# Altium PCB BMS_MAINBOARD_3.PcbDoc (part 1 of 3)
Units mm, origin at the board's own origin, x right, y up, seen from the top; angles counter-clockwise.
Board outline 295.3 x 101.15 mm, 2 copper layers (Top Layer, Bottom Layer), stack 1.571 mm thick; 250 components, 184 nets, 817 pads, 458 vias.
Unrouted connection lines stored in the file: 84.
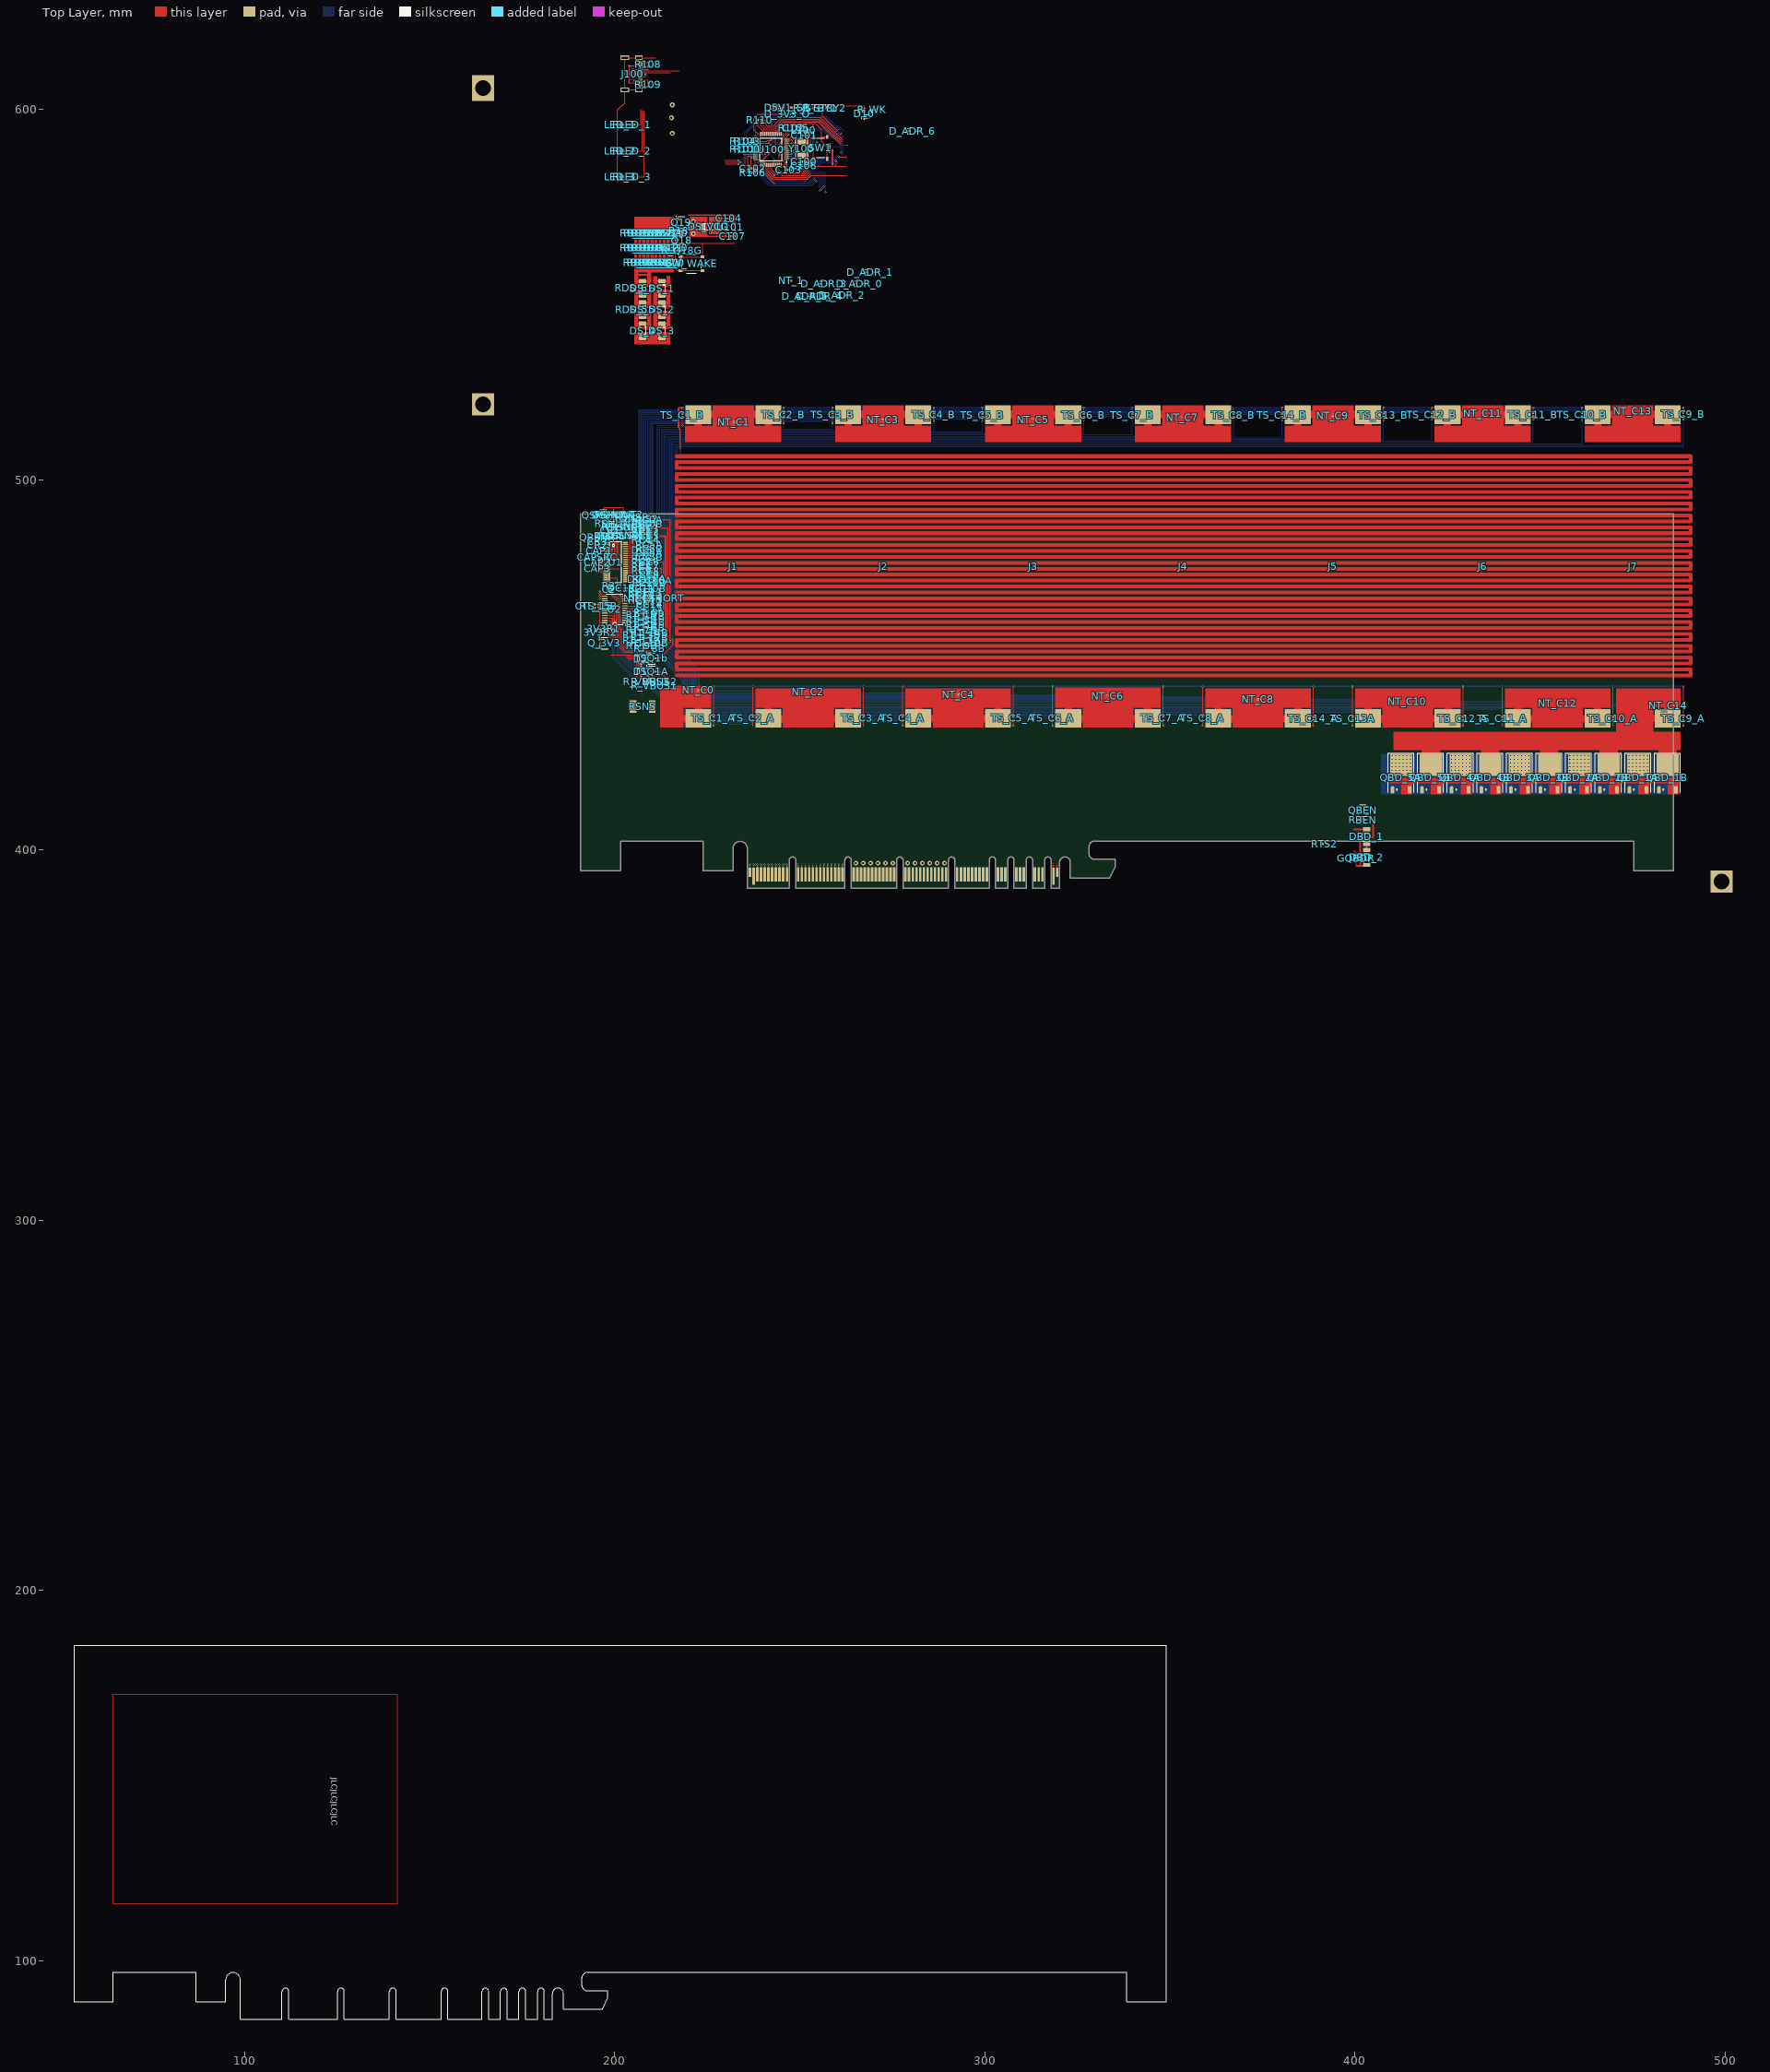
[diagram p0: Top Layer view]
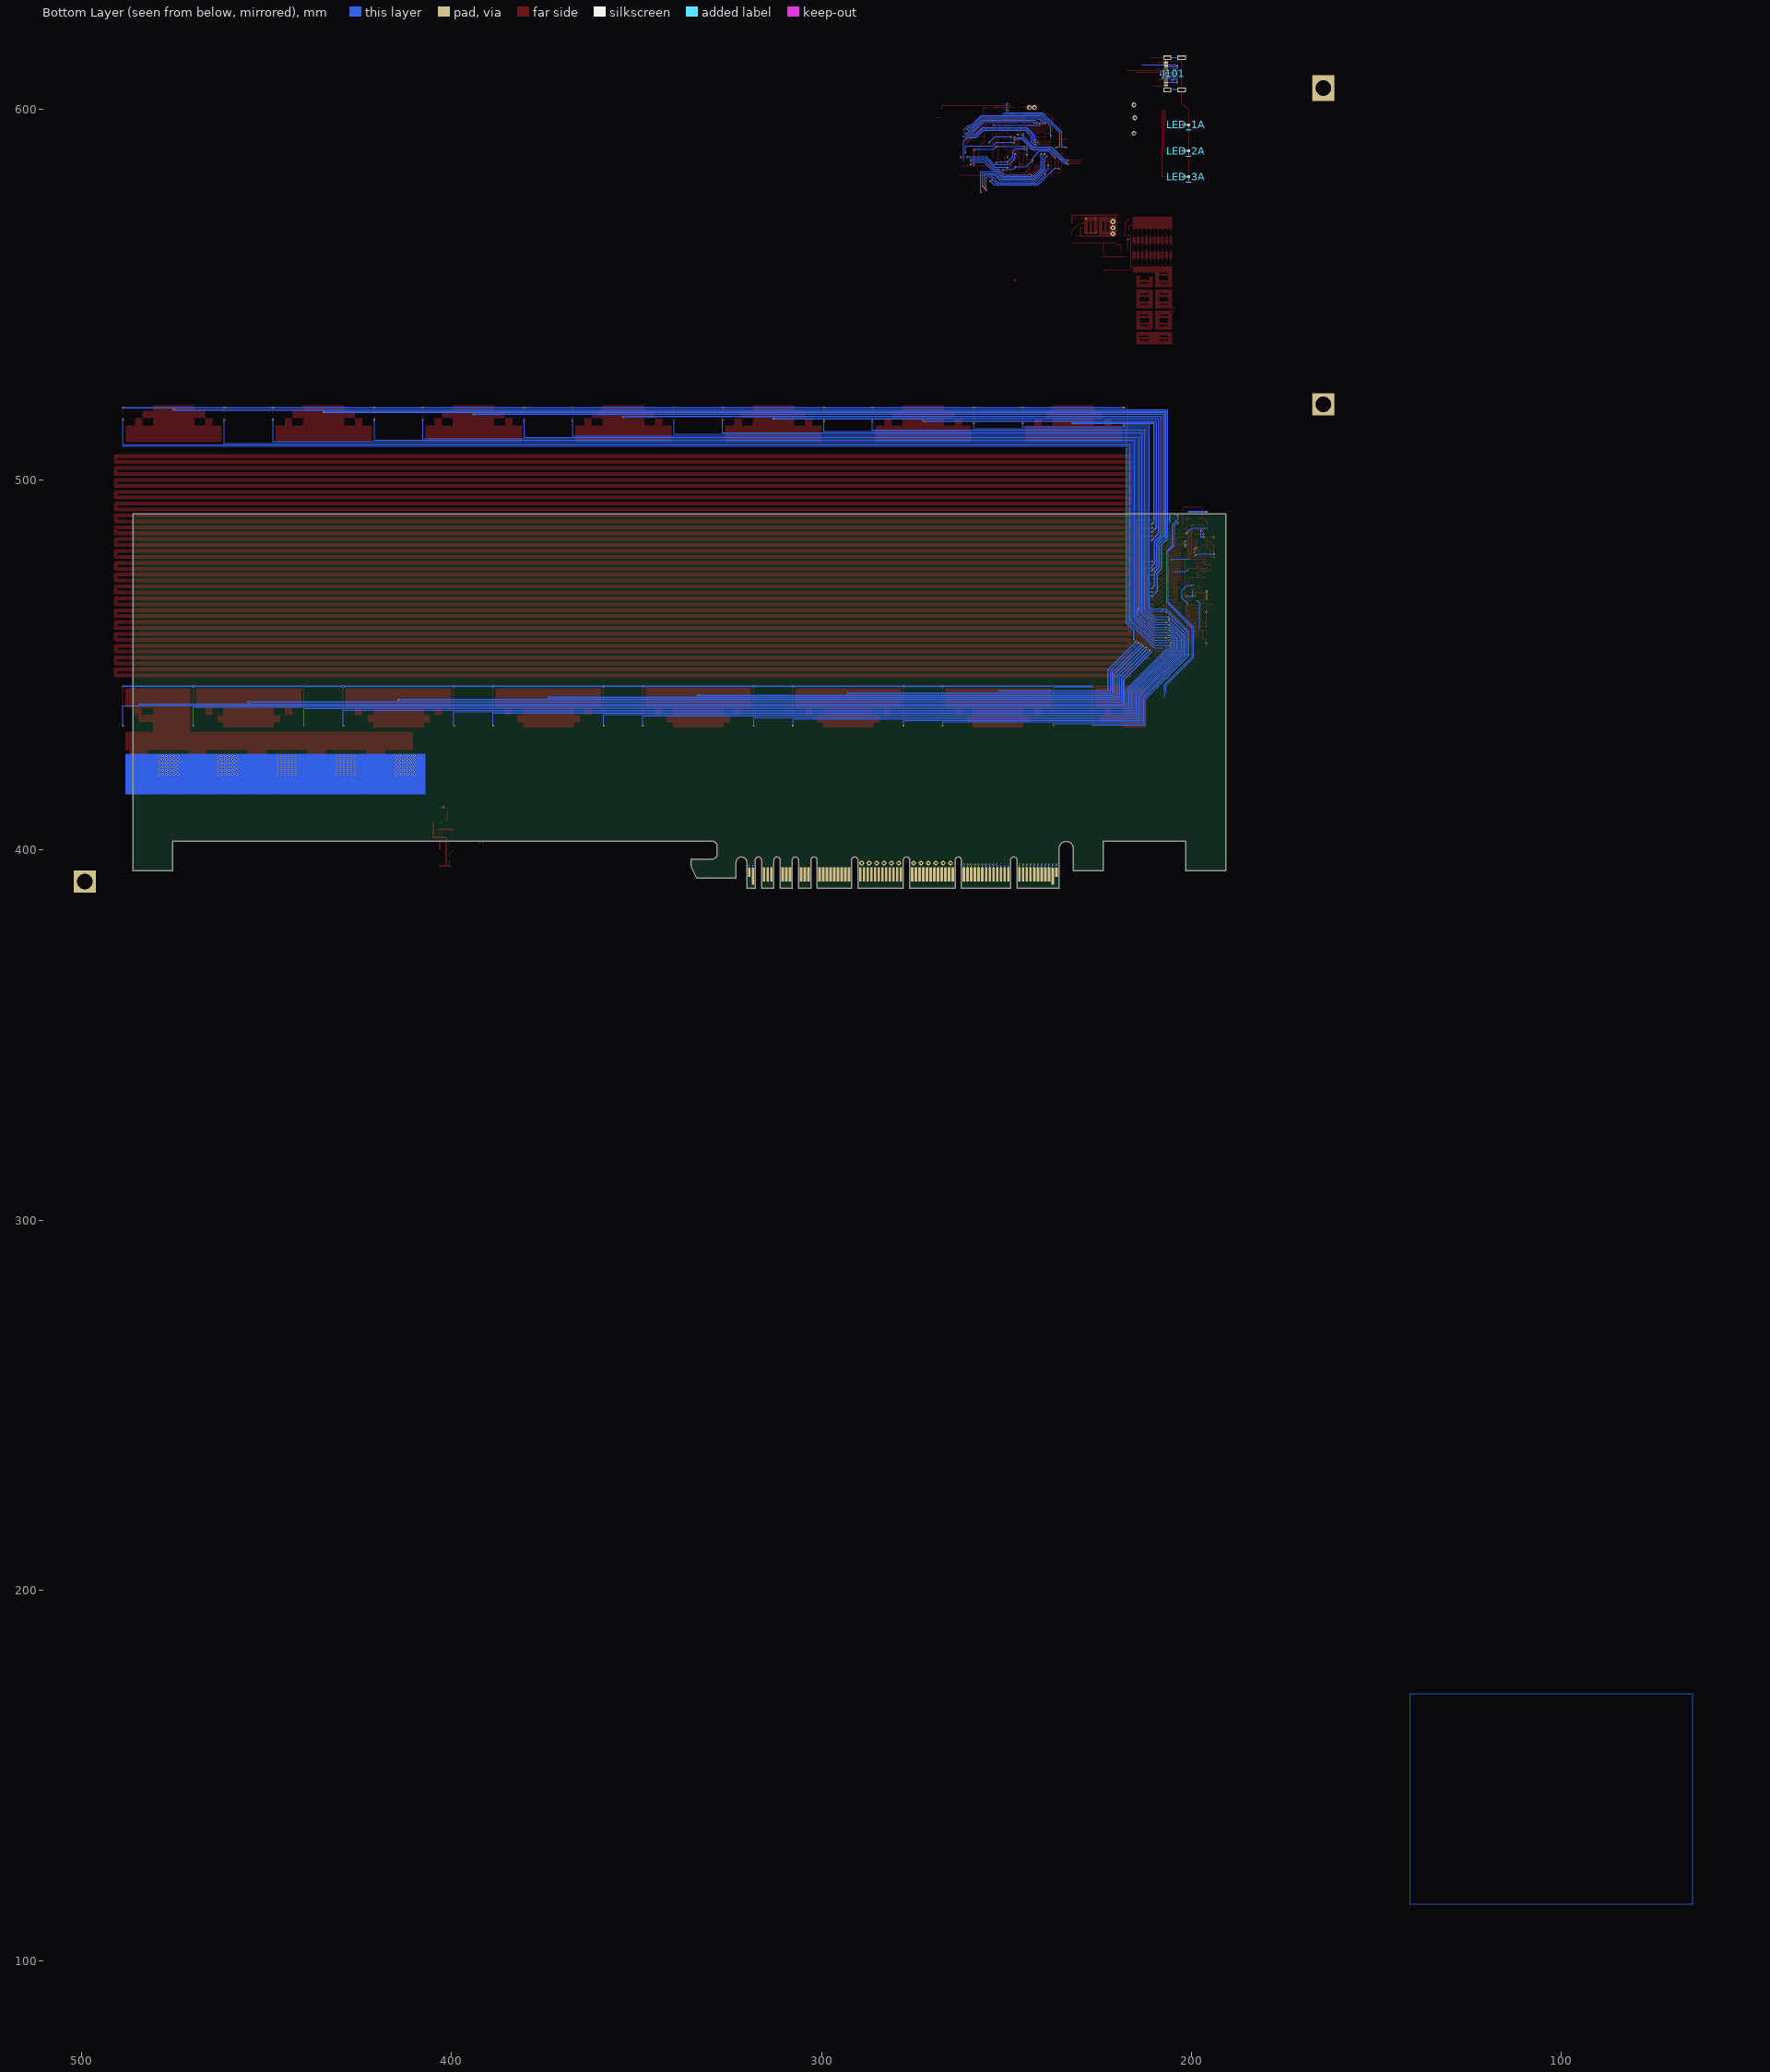
[diagram p1: Bottom Layer view, seen from below]

## Layer stack, top to bottom
Top Solder: solder mask 0.0102, Solder Resist, Dk 3.5
Top Layer: signal copper 0.0356
Dielectric 1: core 1.5, FR-4, Dk 4.2
Bottom Layer: signal copper 0.0356
Bottom Solder: solder mask 0.0102, Solder Resist, Dk 3.5

## Board outline
247.05,389.7 ccw(c247.05,389.75) 247.1,389.75 ccw(c247.05,389.75) 247.1,389.751 247.1,397.25 cw(c248,397.25) 248.9,397.251 ccw(c248.95,397.25) 248.9,397.25 248.9,389.75 ccw(c248.95,389.75) 248.975,389.706 ccw(c249,389.75) 249,389.7 262.099,389.7 ccw(c262.1,389.75) 262.15,389.75 262.15,397.3 ccw(c262.1,397.3) 262.15,397.3 cw(c263,397.3) 263.85,397.3 263.85,389.75 ccw(c263.9,389.75) 263.9,389.7 276.1,389.7 ccw(c276.1,389.75) 276.15,389.75 276.15,397.3 ccw(c276.1,397.3) 276.15,397.3 cw(c277,397.3) 277.85,397.3 277.85,389.75 ccw(c277.9,389.75) 277.9,389.7 290.1,389.7 ccw(c290.1,389.75) 290.15,389.75 290.15,397.3 ccw(c290.1,397.3) 290.15,397.3 ccw(c291,397.3) 290.15,397.3 cw(c291,397.3) 291.85,397.3 291.85,389.75 ccw(c291.9,389.75) 291.9,389.7 301.1,389.7 ccw(c301.1,389.75) 301.15,389.75 301.15,397.3 cw(c301.1,397.3) 301.15,397.3 ccw(c301.1,397.3) 301.15,397.3 cw(c302,397.3) 302.85,397.3 302.85,389.75 ccw(c302.9,389.75) 302.9,389.7 306.1,389.7 ccw(c306.1,389.75) 306.15,389.75 306.15,397.3 cw(c307,397.3) 307.85,397.3 307.85,389.75 ccw(c307.9,389.75) 307.9,389.7 311.1,389.7 ccw(c311.1,389.75) 311.15,389.75 311.15,397.3 cw(c312,397.3) 312.85,397.3 312.85,389.75 ccw(c312.9,389.75) 312.9,389.7 316.1,389.7 ccw(c316.1,389.75) 316.15,389.75 316.15,397.3 ccw(c316.1,397.3) 316.15,397.3 cw(c317,397.3) 317.85,397.3 317.85,389.75 ccw(c317.9,389.75) 317.9,389.7 320.1,389.7 ccw(c320.1,389.75) 320.15,389.75 320.15,396.7 cw(c321.6,396.7) 323.05,396.7 323.05,392.5 ccw(c323.1,392.5) 323.1,392.45 333.7,392.45 ccw(c333.7,392.5) 333.746,392.479 335.146,395.479 ccw(c335.1,395.5) 335.146,395.479 ccw(c335.1,395.5) 335.15,395.5 335.15,397.5 ccw(c335.1,397.5) 335.1,397.55 329.55,397.55 ccw(c329.55,397.5) 329.549,397.55 ccw(c329.55,398.95) 329.55,397.55 329.549,397.55 cw(c329.55,398.95) 328.15,398.95 328.15,400.98 cw(c329.62,400.973) 329.62,402.443 ccw(c329.62,402.493) 329.646,402.45 475.243,402.45 475.243,394.5 ccw(c475.293,394.5) 475.297,394.45 ccw(c475.3,394.5) 475.3,394.45 486,394.45 ccw(c486,394.5) 486.05,394.5 486.05,394.501 486.05,490.8 ccw(c486,490.8) 486,490.85 190.8,490.85 ccw(c190.8,490.8) 190.75,490.8 190.75,394.5 ccw(c190.8,394.5) 190.8,394.45 201.5,394.45 ccw(c201.5,394.5) 201.55,394.5 ccw(c201.5,394.5) 201.544,394.525 201.544,402.45 223.793,402.45 223.793,394.5 ccw(c223.843,394.5) 223.847,394.45 ccw(c223.85,394.5) 223.85,394.45 231.85,394.45 ccw(c231.85,394.5) 231.9,394.5 231.9,400.4 ccw(c231.85,400.4) 231.894,400.425 cw(c233.843,400.4) 235.793,400.4 ccw(c235.843,400.4) 235.8,400.375 235.8,389.75 ccw(c235.85,389.75) 235.85,389.7

## Design rules (kind name [scope] priority, off if disabled: settings)
Clearance [All] p1: gap=0.2 ignorepadtopadclearanceinfootprint=FALSE except(0: Arc-Hole Track-Hole SMDPad-Hole THPad-Hole Via-Hole Fill-Hole Poly-Hole Region-Hole Text-Hole)
PolygonConnect [All] p1: thpad.connectstyle=Relief thpad.reliefconductorwidth=0.254 thpad.reliefentries=4 thpad.polygonreliefangle="90 Angle" thpad.airgapwidth=0.254 smdpad.connectstyle=Relief smdpad.reliefconductorwidth=0.254 smdpad.reliefentries=4 smdpad.polygonreliefangle="90 Angle" smdpad.airgapwidth=0.254 via.connectstyle=Direct via.reliefconductorwidth=0.254 via.reliefentries=4 via.polygonreliefangle="90 Angle" via.airgapwidth=0.254
RoutingVias [All] p1: holewidth=0.711 width=1.27 viastyle="Through Hole" minholewidth=0.711 minwidth=1.27 maxholewidth=0.711 maxwidth=1.27
SolderMaskExpansion [All] p1: expansion=0.102
Width [All] p1: maxlimit=1 minlimit=0.2 preferedwidth=0.2 minimp=50.000000 maximp=50.000000 favimp=50.000000
30 further rules are at their usual default settings.

## Components (designator, comment, footprint, x,y, rotation, side; value= is the part's Value field where it differs from the comment)
3V3R1 "0402WGF1002TCE" R_0402 197,459.8 r270 top value=10k
3V3R2 "0402WGF1000TCE" R_0402 196.1,458.8 r270 top value=100R
C2 "CL05B104KO5NNNC" C_0402 198.4,470.412 r180 top value=100nF
C100 "0402CG120J500NT" C_0402 251.112,586 r180 top value=12pF
C101 "0402CG120J500NT" C_0402 251.212,593.1 r180 top value=12pF
C102 "CL05A106MQ5NUNC" C_0402 237.319,584.1 r0 top value=10uF
C103 "CL05A106MQ5NUNC" C_0402 247.019,583.7 r180 top value=10uF
C104 "CL05A106MQ5NUNC" C_0402 230.769,570.6 r0 top value=10uF
C105 "CL05A105KA5NQNC" C_0402 249.012,595.1 r270 top value=1uF
C106 "0402CG101J500NT" C_0402 251.112,584.8 r180 top
C107 "CL05A106MQ5NUNC" C_0402 231.769,565.85 r180 top value=10uF
CAP1 "CL05A105KA5NQNC" C_0402 195.8,480.812 r90 top value=1uF
CAP2 "CL05A105KA5NQNC" C_0402 195.3,477.712 r0 top value=1uF
CAP3 "CL05A105KA5NQNC" C_0402 195.3,476.012 r0 top value=1uF
CAPSRC "CL05A105KA5NQNC" C_0402 195.3,479.112 r180 top value=1uF
CC0A "CL05A105KA5NQNC" C_0402 209.4,489.219 r180 top value=1uF
CC0B "CL05A105KA5NQNC" C_0402 209.392,488.112 r0 top value=1uF
CC1 "CL05A105KA5NQNC" C_0402 209.4,487.012 r0 top value=1uF
CC2 "CL05A105KA5NQNC" C_0402 209.4,485.912 r0 top value=1uF
CC3 "CL05A105KA5NQNC" C_0402 209.4,484.812 r0 top value=1uF
CC4 "CL05A105KA5NQNC" C_0402 209.4,483.712 r0 top value=1uF
CC5A "CL05A105KA5NQNC" C_0402 209.4,480.212 r180 top value=1uF
CC5B "CL05A105KA5NQNC" C_0402 209.4,479.112 r180 top value=1uF
CC6 "CL05A105KA5NQNC" C_0402 209.4,477.912 r180 top value=1uF
CC7 "CL05A105KA5NQNC" C_0402 209.4,476.812 r180 top value=1uF
CC8 "CL05A105KA5NQNC" C_0402 209.4,475.412 r0 top value=1uF
CC9 "CL05A105KA5NQNC" C_0402 209.4,474.312 r0 top value=1uF
CC10A "CL05A105KA5NQNC" C_0402 211,472.719 r270 top value=1uF
CC10B "CL05A105KA5NQNC" C_0402 209.4,470.712 r0 top value=1uF
CC11 "CL05A105KA5NQNC" C_0402 209.4,469.712 r0 top value=1uF
CC12 "CL05A105KA5NQNC" C_0402 209.4,468.612 r0 top value=1uF
CC13 "CL05A105KA5NQNC" C_0402 209.4,467.512 r0 top value=1uF
CC14 "CL05A105KA5NQNC" C_0402 209.408,466.412 r0 top value=1uF
CC15 "0402WGF1001TCE" R_0402 209.4,465.412 r0 top value=1k
CR1 "CL05A105KA5NQNC" C_0402 198.8,486.312 r180 top value=1uF
CR2 "CL05A105KA5NQNC" C_0402 195.308,482.312 r0 top value=1uF
CR3 "CL05A105KA5NQNC" C_0402 195.3,483.412 r0 top value=1uF
CSNS0 "CL05B104KO5NNNC" C_0402 202.3,485.012 r270 top value=100nF
CSNS1 "CL05B104KO5NNNC" C_0402 203.7,485.012 r90 top value=100nF
CSNS2 "CL05B104KO5NNNC" C_0402 207.319,489.5 r0 top value=100nF
CTS_15 "CL05B104KO5NNNC" C_0402 194.5,465.919 r90 top value=100nF
D1 "N4148WS" SOD-323 207.1,448.2 r270 top
D2 "N4148WS" SOD-323 207.1,451.6 r90 top
D5V1_SB "N4148WS" SOD-323 246.619,600.6 r0 top
D10 "N4148WS" SOD-323 267.419,598.9 r90 top
D_3V3_O "N4148WS" SOD-323 246.619,598.8 r180 top
D_ADR_0 "N4148WS" SOD-323 266.1,553 r0 top
D_ADR_1 "N4148WS" SOD-323 268.9,556.1 r0 top
D_ADR_2 "N4148WS" SOD-323 261.3,549.9 r0 top
D_ADR_3 "N4148WS" SOD-323 256.5,553 r0 top
D_ADR_4 "N4148WS" SOD-323 255.4,549.6 r0 top
D_ADR_5 "N4148WS" SOD-323 251.4,549.6 r0 top
D_ADR_6 "N4148WS" SOD-323 280.419,594.2 r0 top
DBD_1 "ZMM5V1" DO-213AA 403.081,403.6 r270 top
DBD_2 "ZMM5V1" DO-213AA 403.081,398 r270 top
DC5 "N4148WS" SOD-323 207.4,481.012 r90 top
DC10 "N4148WS" SOD-323 207.2,473.112 r90 top
DC15 "N4148WS" SOD-323 201.8,470.8 r0 top
DS_1 "ZMM5V1" DO-213AA 212.7,551.7 r270 top
DS_2 "ZMM5V1" DO-213AA 212.7,546 r270 top
DS_3 "ZMM5V1" DO-213AA 212.7,540.3 r270 top
DS_4 "ZMM5V1" DO-213AA 207.481,540.307 r90 top
DS_5 "ZMM5V1" DO-213AA 207.5,546 r90 top
DS_6 "ZMM5V1" DO-213AA 207.5,551.7 r90 top
DS_VCC "ZMM5V1" DO-213AA 225.212,568.4 r0 top
DSHUNT "N4148WS" SOD-323 199.7,490.419 r90 top
GQBDR "0402WGF1002TCE" R_0402 400.381,397.8 r270 top value=10k
J1 "KS18650X2-SMT" KS18650X2-SMT 232,476.6 r0 top
J2 "KS18650X2-SMT" KS18650X2-SMT 272.5,476.6 r0 top
J3 "KS18650X2-SMT" KS18650X2-SMT 313,476.6 r0 top
J4 "KS18650X2-SMT" KS18650X2-SMT 353.5,476.6 r0 top
J5 "KS18650X2-SMT" KS18650X2-SMT 394,476.6 r0 top
J6 "KS18650X2-SMT" KS18650X2-SMT 434.5,476.6 r0 top
J7 "KS18650X2-SMT" KS18650X2-SMT 475,476.6 r0 top
J100 "918-418K2023S40001" DX07S016JA1R1500 203.619,609.7 r270 top
J101 "918-418K2023S40001" DX07S016JA1R1500 203.619,609.7 r90 bottom
L100 "SDFL1608S100KTF" L_0603 251.012,594.5 r0 top value=10uH
LED_1 "19-21UYC/S530-A4/TR8" D_0603 201.419,595.9 r0 top
LED_1A "19-21UYC/S530-A4/TR8" D_0603 201.419,595.9 r0 bottom
LED_2 "19-21UYC/S530-A4/TR8" D_0603 201.419,588.9 r0 top
LED_2A "19-21UYC/S530-A4/TR8" D_0603 201.419,588.9 r0 bottom
LED_3 "19-21UYC/S530-A4/TR8" D_0603 201.402,581.9 r0 top
LED_3A "19-21UYC/S530-A4/TR8" D_0603 201.419,581.9 r0 bottom
NT_1 "0" NET_TIE 247.6,553.9 r90 top
NT_2 "0" NET_TIE 199.8,487.819 r270 top
NT_C0 "0" NET_TIE 222.6,443.3 r270 top
NT_C1 "0" NET_TIE 232.2,515.6 r270 top
NT_C2 "0" NET_TIE 252.3,442.7 r270 top
NT_C3 "0" NET_TIE 272.4,516.2 r270 top
NT_C4 "0" NET_TIE 292.8,442 r270 top
NT_C5 "0" NET_TIE 313,516.2 r270 top
NT_C6 "0" NET_TIE 333.2,441.6 r270 top
NT_C7 "0" NET_TIE 353.4,516.8 r90 top
NT_C8 "0" NET_TIE 373.8,440.8 r270 top
NT_C9 "0" NET_TIE 394,517.4 r90 top
NT_C10 "0" NET_TIE 414.2,440.2 r270 top
NT_C11 "0" NET_TIE 434.6,518 r90 top
NT_C12 "0" NET_TIE 454.8,439.6 r270 top
NT_C13 "0" NET_TIE 475,518.6 r90 top
NT_C14 "0" NET_TIE 484.6,439 r270 top
NT_CSHORT "0" NET_TIE 210.6,468.1 r90 top
Q18 "2N7002" TO-236AB 218.119,564.7 r90 top
Q19 "AO3401A" TO-236AB 218.012,569.6 r0 top
Q_3V3 "AO3401A" TO-236AB 197.2,455.919 r0 top
QBD_1A "NCE60P12K" TO-252AA 476.5,423 r90 top
QBD_1B "NCE60P12K" TO-252AA 484.5,423 r90 top
QBD_2A "NCE60P12K" TO-252AA 460.5,423 r90 top
QBD_2B "NCE60P12K" TO-252AA 468.5,423 r90 top
QBD_3A "NCE60P12K" TO-252AA 444.5,423 r90 top
QBD_3B "NCE60P12K" TO-252AA 452.5,423 r90 top
QBD_4A "NCE60P12K" TO-252AA 428.5,423 r90 top
QBD_4B "NCE60P12K" TO-252AA 436.5,423 r90 top
QBD_5A "NCE60P12K" TO-252AA 412.5,423 r90 top
QBD_5B "NCE60P12K" TO-252AA 420.5,423 r90 top
QBEN "2N7002" TO-236AB 402.081,410.7 r180 top
QBENR "0402WGF1002TCE" R_0402 195.3,484.519 r0 top value=10k
QSHUNT "2N7002" TO-236AB 196.9,490.419 r180 top
R2 "0402WGF1000TCE" R_0402 198.4,471.412 r0 top value=100R
R18 "0402WGF1002TCE" R_0402 217.319,567.3 r0 top value=10k
R100 "0402WGF220JTCE" R_0402 235.819,589.3 r270 top value=22R
R101 "0402WGF220JTCE" R_0402 234.719,589.3 r270 top value=22R
R102 "0402WGF0000TCE" R_0402 247.812,595.1 r90 top value=0R
R103 "0402WGF0000TCE" R_0402 235.819,591.4 r90 top value=0R
R104 "0402WGF0000TCE" R_0402 234.719,591.4 r90 top value=0R
R106 "0402WGF1501TCE" R_0402 237.319,583 r0 top value=1.5k
R108 "0402WGF5101TCE" R_0402 209.019,612.3 r270 top value=5.1k
R109 "0402WGF5101TCE" R_0402 209.019,606.8 r90 top value=5.1k
R110 "0402WGF1001TCE" R_0402 239.112,597.2 r180 top value=1k
R_Q18G "0402WGF1002TCE" R_0402 218.119,562 r0 top value=10k
R_STBY1 "0402WGF1002TCE" R_0402 254.219,600.4 r180 top value=10k
R_STBY2 "0402WGF1002TCE" R_0402 256.619,600.4 r180 top value=10k
R_VBUS1 "0402WGF1002TCE" R_0402 210.7,444.4 r0 top value=10k
R_VBUS2 "0402WGF1002TCE" R_0402 210.7,445.5 r0 top value=10k
R_VBUS3 "0402WGF1001TCE" R_0402 208.5,445.5 r0 top value=1k
R_WK "0402WGF1000TCE" R_0402 269.6,600 r180 top value=100R
RBEN "0402WGF1000TCE" R_0402 402.081,408.1 r0 top value=100R
RC0 "0402WGF1001TCE" R_0402 207.3,488.112 r0 top value=1k
RC1 "0402WGF1001TCE" R_0402 207.3,487.012 r0 top value=1k
RC2 "0402WGF1001TCE" R_0402 207.3,485.912 r0 top value=1k
RC3 "0402WGF1001TCE" R_0402 207.3,484.812 r0 top value=1k
RC4 "0402WGF1001TCE" R_0402 207.3,483.712 r0 top value=1k
RC5A "0402WGF1001TCE" R_0402 209.4,482.512 r0 top value=1k
RC5B "0402WGF1001TCE" R_0402 209.4,481.312 r0 top value=1k
RC6 "0402WGF1001TCE" R_0402 207.3,478.712 r0 top value=1k
RC7 "0402WGF1001TCE" R_0402 207.3,477.612 r0 top value=1k
RC8 "0402WGF1001TCE" R_0402 207.3,476.512 r0 top value=1k
RC9 "0402WGF1001TCE" R_0402 207.3,475.412 r0 top value=1k
RC10A "0402WGF1001TCE" R_0402 209.4,473.212 r0 top value=1k
RC10B "0402WGF1001TCE" R_0402 209.4,472.112 r0 top value=1k
RC11 "0402WGF1001TCE" R_0402 207.3,470.712 r0 top value=1k
RC12 "0402WGF1001TCE" R_0402 207.3,469.712 r0 top value=1k
RC13 "0402WGF1001TCE" R_0402 207.3,468.612 r0 top value=1k
RC14 "0402WGF1001TCE" R_0402 207.3,467.512 r0 top value=1k
RDS_5 "0402WGF0000TCE" R_0402 204.719,546 r90 top value=0R
RDS_6 "0402WGF0000TCE" R_0402 204.5,551.8 r90 top value=0R
RLED_1 "0402WGF1001TCE" R_0402 204.702,595.9 r0 top value=1k
RLED_2 "0402WGF1001TCE" R_0402 204.702,588.9 r0 top value=1k
RLED_3 "0402WGF1001TCE" R_0402 204.702,581.9 r0 top value=1k
RS_0 "0402WGF1001TCE" R_0402 215.512,558.7 r270 top value=1k
RS_1 "0402WGF1001TCE" R_0402 214.412,558.7 r270 top value=1k
RS_2 "0402WGF1001TCE" R_0402 213.312,558.7 r270 top value=1k
RS_3 "0402WGF1001TCE" R_0402 212.212,558.7 r270 top value=1k
RS_4 "0402WGF1001TCE" R_0402 211.112,558.7 r270 top value=1k
RS_5 "0402WGF1001TCE" R_0402 210.012,558.7 r270 top value=1k
RS_6 "0402WGF1001TCE" R_0402 208.913,558.7 r270 top value=1k
RS_7 "0402WGF1001TCE" R_0402 207.812,558.7 r270 top value=1k
RS_8 "0402WGF1001TCE" R_0402 206.712,558.7 r270 top value=1k
RS_9 "0402WGF1001TCE" R_0402 205.612,558.7 r270 top value=1k
RS_10 "0402WGF1001TCE" R_0402 215.512,562.7 r270 top value=1k
RS_11 "0402WGF1001TCE" R_0402 214.412,562.7 r270 top value=1k
RS_12 "0402WGF1001TCE" R_0402 213.312,562.7 r270 top value=1k
RS_13 "0402WGF1001TCE" R_0402 212.212,562.7 r270 top value=1k
RS_14 "0402WGF1001TCE" R_0402 211.112,562.7 r270 top value=1k
RS_15 "0402WGF1001TCE" R_0402 210.012,562.7 r270 top value=1k
RS_16 "0402WGF1001TCE" R_0402 208.912,562.7 r270 top value=1k
RS_17 "0402WGF1001TCE" R_0402 207.812,562.7 r270 top value=1k
RS_18 "0402WGF1001TCE" R_0402 206.712,562.7 r270 top value=1k
RS_19 "0402WGF1001TCE" R_0402 205.612,562.7 r270 top value=1k
RS_20 "0402WGF1001TCE" R_0402 215.512,566.7 r270 top value=1k
RS_21 "0402WGF1001TCE" R_0402 214.412,566.7 r270 top value=1k
RS_22 "0402WGF1001TCE" R_0402 213.312,566.7 r270 top value=1k
RS_23 "0402WGF1001TCE" R_0402 212.212,566.7 r270 top value=1k
RS_24 "0402WGF1001TCE" R_0402 211.112,566.7 r270 top value=1k
RS_25 "0402WGF1001TCE" R_0402 210.012,566.7 r270 top value=1k
RS_26 "0402WGF1001TCE" R_0402 208.912,566.7 r270 top value=1k
RS_27 "0402WGF1001TCE" R_0402 207.812,566.7 r270 top value=1k
RS_28 "0402WGF1001TCE" R_0402 206.712,566.7 r270 top value=1k
RS_29 "0402WGF1001TCE" R_0402 205.612,566.7 r270 top value=1k
RSCL "0402WGF1002TCE" R_0402 199.3,484.812 r270 top value=10k
RSDA "0402WGF1002TCE" R_0402 198.3,484.812 r270 top value=10k
RSHUNT "0402WGF1003TCE" R_0402 202.3,487.219 r90 top value=100k
RSHUNT2 "0402WGF1003TCE" R_0402 201.2,490.619 r90 top value=100k
RSHUNT3 "0402WGF1000TCE" R_0402 201.2,488.219 r90 top value=100R
RSNS "1m" R_2512 207.5,438.8 r180 top
RSNSN "0402WGF1000TCE" R_0402 203.7,487.212 r270 top value=100R
RSNSP "0402WGF1000TCE" R_0402 204.5,489.912 r270 top value=100R
RT_0b "0402WGF1002TCE" R_0402 209.4,464.219 r0 top value=10k (schematic designator RT_0B)
RT_1B "0402WGF1002TCE" R_0402 207.3,463.619 r0 top value=10k
RT_2B "0402WGF1002TCE" R_0402 209.4,463.019 r0 top value=10k
RT_3B "0402WGF1002TCE" R_0402 207.3,462.219 r0 top value=10k
RT_4B "0402WGF1002TCE" R_0402 209.4,461.519 r0 top value=10k
RT_5B "0402WGF1002TCE" R_0402 207.3,460.819 r0 top value=10k
RT_6B "0402WGF1002TCE" R_0402 209.4,460.119 r0 top value=10k
RT_7B "0402WGF1002TCE" R_0402 207.3,459.419 r0 top value=10k
RT_8B "0402WGF1002TCE" R_0402 209.4,454.519 r0 top value=10k
RT_9B "0402WGF1002TCE" R_0402 207.3,455.219 r0 top value=10k
RT_10B "0402WGF1002TCE" R_0402 209.408,455.919 r0 top value=10k
RT_11B "0402WGF1002TCE" R_0402 207.3,456.619 r0 top value=10k
RT_12B "0402WGF1002TCE" R_0402 209.4,457.319 r0 top value=10k
RT_13B "0402WGF1002TCE" R_0402 207.3,458.019 r0 top value=10k
RT_14B "0402WGF1002TCE" R_0402 209.4,458.719 r0 top value=10k
RT_15B "0402WGF1002TCE" R_0402 195.6,465.919 r270 top value=10k
RTS2 "NCP15XH103F03RC" R_0402 391.781,401.7 r180 top value=10k
SW1 "TS-1187A-C-C-B" TS-1187A-C-C-B 255.519,589.7 r90 top
SW_WAKE "TS-1187A-C-C-B" TS-1187A-C-C-B 220.719,558.4 r180 top
TS_C1_A "NCP15XH103F03RC" R_0402 226.7,435.6 r270 top value=10k
TS_C1_B "NCP15XH103F03RC" R_0402 218.3,517.5 r270 top value=10k
TS_C2_A "NCP15XH103F03RC" R_0402 237.3,435.6 r270 top value=10k
TS_C2_B "NCP15XH103F03RC" R_0402 245.6,517.6 r270 top value=10k
TS_C3_A "NCP15XH103F03RC" R_0402 267.2,435.6 r270 top value=10k
TS_C3_B "NCP15XH103F03RC" R_0402 258.8,517.6 r270 top value=10k
TS_C4_A "NCP15XH103F03RC" R_0402 277.8,435.6 r270 top value=10k
TS_C4_B "NCP15XH103F03RC" R_0402 286.2,517.6 r270 top value=10k
TS_C5_A "NCP15XH103F03RC" R_0402 307.7,435.6 r270 top value=10k
TS_C5_B "NCP15XH103F03RC" R_0402 299.3,517.5 r270 top value=10k
TS_C6_A "NCP15XH103F03RC" R_0402 318.3,435.6 r270 top value=10k
TS_C6_B "NCP15XH103F03RC" R_0402 326.7,517.5 r270 top value=10k
TS_C7_A "NCP15XH103F03RC" R_0402 348.2,435.6 r270 top value=10k
TS_C7_B "NCP15XH103F03RC" R_0402 339.8,517.5 r270 top value=10k
TS_C8_A "NCP15XH103F03RC" R_0402 358.8,435.6 r270 top value=10k
TS_C8_B "NCP15XH103F03RC" R_0402 367.2,517.5 r270 top value=10k
TS_C9_A "NCP15XH103F03RC" R_0402 488.7,435.5 r270 top value=10k
TS_C9_B "NCP15XH103F03RC" R_0402 488.7,517.7 r270 top value=10k
TS_C10_A "NCP15XH103F03RC" R_0402 469.7,435.5 r270 top value=10k
TS_C10_B "NCP15XH103F03RC" R_0402 461.3,517.6 r270 top value=10k
TS_C11_A "NCP15XH103F03RC" R_0402 439.8,435.5 r270 top value=10k
TS_C11_B "NCP15XH103F03RC" R_0402 448.2,517.6 r270 top value=10k
TS_C12_A "NCP15XH103F03RC" R_0402 429.2,435.5 r270 top value=10k
TS_C12_B "NCP15XH103F03RC" R_0402 420.8,517.6 r270 top value=10k
TS_C13_B "NCP15XH103F03RC" R_0402 407.7,517.5 r270 top value=10k
TS_C13A "NCP15XH103F03RC" R_0402 399.3,435.5 r270 top value=10k
TS_C14_A "NCP15XH103F03RC" R_0402 388.7,435.5 r270 top value=10k
TS_C14_B "NCP15XH103F03RC" R_0402 380.3,517.5 r270 top value=10k
TSQ1A "2N7002" TO-236AB 210,448.2 r0 top (schematic designator TSQ1a)
TSQ1b "2N7002" TO-236AB 209.95,451.8 r0 top
U1 "BQ7694002DBTR" TSSOP50P580X150-44N 200.2,477.812 r0 top
U2 "74HC4067PW,118" TSSOP-24-P0.65MM-W4.4MM 200,465.012 r180 top
U100 "GD32F103CBT6" QFP-48-P0.5MM 242.162,589.275 r180 top
U101 "XC6206P332MR" TO-236AB 231.162,568.3 r180 top
Y100 "X50328MSB2GI" YSX530GA 250.512,589.5 r90 top value=8MHz

## Footprints (in the part's own frame and the unit in brackets; to place one, negate y for a bottom-side part, rotate by r counter-clockwise, add the part's x,y. Pads: shape width x height; smd on the part's side, far side on the other; paste and mask are expansions set on the pad)
C_0402 [mm] "Chip Capacitor; Body 1.0 x 0.5 mm (LxW typ)"
  rect 0.6x0.6 smd: 1(-0.508,0) 2(0.508,0)
  body extent -0.5,-0.3 0.5,0.3, height 0.2
D_0603 [mm] "Chip Diode; Body 1.6 x 0.8 mm (LxW typ)"
  rect 0.8x0.8 smd: 1(-0.7,0) 2(0.7,0)
  silkscreen extent -0.1,-0.25 0.1,0.25, body extent -0.8,-0.4 0.8,0.4, height 0.35
DO-213AA [mm] "2 Leads"
  rect 1.1x2 smd: 1(-2,0) 2(2,0)
  silkscreen extent -1.2,-0.9 1.2,0.9, body extent -1.85,-0.8 1.85,0.8, height 1.61
DX07S016JA1R1500 [mm] "USB-C (USB TYPE-C) USB 2.0 Receptacle Connector 24 (16+8 Dummy) Position Surface Mount, Right Angle"
  rect 1.2x2 hole 0.55 slot 1.6 at 90 deg: 0(-4.32,2.917) 0(4.33,2.917)
  rect 1.2x2.3 hole 0.55 slot 1.8 at 90 deg: 0(-4.32,-0.943) 0(4.33,-0.943)
  rect 0.6x1.15 smd: A1_B12(-3.1,3.297) A4_B9(-2.35,3.297) A9_B4(2.35,3.3) A12_B1(3.1,3.297)
  rect 0.3x1.15 smd: A5(-1.25,3.297) A6(-0.25,3.297) A7(0.25,3.3) A8(1.25,3.297) B5(1.75,3.297) B6(0.75,3.297) B7(-0.75,3.297) B8(-1.75,3.297)
  round 0 hole 0.65 unplated: M(-3,2.2) M(3,2.2)
  body extent -4.47,-3.35 4.47,3.55, height 3.18
KS18650X2-SMT [mm] "SMT Battery Holder 18650X2 Cells"
  rect 7x5 smd: 1(-9.5,-41) 2(-9.5,41) 3(9.5,-41) 4(9.5,41)
  body extent -19.9,-43.2 19.9,43.2, height 18.8
L_0603 [mm]
  rect 0.93x0.98 smd: 1(-0.77,0) 2(0.77,0)
  body extent -0.8,-0.41 0.8,0.41, height 0.46
NET_TIE [mm] "Body 1.0 x 0.5 mm (LxW typ)"
  rect 0.2x0.6 smd: 1(-0.2,0)
  rect 0.2x0.6 smd mask+0.102: 2(0.2,0)
  Top Layer region: -0.2,-0.3 0.2,-0.3 0.2,0.3 -0.2,0.3
QFP-48-P0.5MM [mm] "QFP; 48 Leads; Body 7 x 7 mm; Pitch 0.5 mm"
  rect 1.2x0.3 smd: 1(-4.175,2.75) 2(-4.175,2.25) 3(-4.175,1.75) 4(-4.175,1.25) 5(-4.175,0.75) 6(-4.175,0.25) 7(-4.175,-0.25) 8(-4.175,-0.75) 9(-4.175,-1.25) 10(-4.175,-1.75) 11(-4.175,-2.25) 12(-4.175,-2.75) 25(4.175,-2.75) 26(4.175,-2.25) 27(4.175,-1.75) 28(4.175,-1.25) 29(4.175,-0.75) 30(4.175,-0.25) 31(4.175,0.25) 32(4.175,0.75) 33(4.175,1.25) 34(4.175,1.75) 35(4.175,2.25) 36(4.175,2.75)
  rect 0.3x1.2 smd: 13(-2.75,-4.175) 14(-2.25,-4.175) 15(-1.75,-4.175) 16(-1.25,-4.175) 17(-0.75,-4.175) 18(-0.25,-4.175) 19(0.25,-4.175) 20(0.75,-4.175) 21(1.25,-4.175) 22(1.75,-4.175) 23(2.25,-4.175) 24(2.75,-4.175) 37(2.75,4.175) 38(2.25,4.175) 39(1.75,4.175) 40(1.25,4.175) 41(0.75,4.175) 42(0.25,4.175) 43(-0.25,4.175) 44(-0.75,4.175) 45(-1.25,4.175) 46(-1.75,4.175) 47(-2.25,4.175) 48(-2.75,4.175)
  silkscreen extent -4.3,-3 3,3.57, body extent -4.5,-4.5 4.5,4.5, height 1.6
R_0402 [mm] "Body 1.0 x 0.5 mm (LxW typ)"
  rect 0.6x0.6 smd: 1(-0.508,0) 2(0.508,0)
  body extent -0.5,-0.25 0.5,0.25, height 0.35
R_2512 [mm] "VISHAY SHUNT RESISTOR"
  rect 1.8x3.4 smd: 1(-2.6,0) 2(2.6,0)
  body extent -3.17,-1.57 3.17,1.6, height 1.22
SOD-323 [mm] "SOD-323/SC-76; 2 Leads; Body 1.7 x 1.3 mm, (LxW)"
  rect 1x0.45 smd: 1(-1.1,0) 2(1.1,0)
  silkscreen extent -1.3,-0.7 -0.7,0.7, body extent -1.43,-0.74 1.43,0.76, height 1.12
TO-236AB [mm] "SOT-23-3 Leads; Body 3.1 x 3 mm, inc. leads (LxW max)"
  rect 0.8x0.55 smd: 1(-1.15,0.95) 2(-1.15,-0.95) 3(1.15,0)
  silkscreen extent -1.45,-1.55 0.9,1.65, body extent -1.28,-1.5 1.27,1.5, height 1
TO-252AA [mm] "DPAK"
  oct 2x1 smd: 1(-6.75,2.4)
  rect 6x6 smd: 2(0,0)
  rect 2x1 smd: 3(-6.65,-2.2)
  silkscreen extent -7.4,-3.4 3.2,3.6, body extent -7.41,-3.26 3.01,3.46, height 2.39
TS-1187A-C-C-B [mm] "Tactile Switch SPST-NO Top Actuated Surface Mount"
  rect 1.1x0.7 smd: 1(-2.95,1.85) 1(2.95,1.85) 2(-2.95,-1.85) 2(2.95,-1.85)
  silkscreen extent -2.6,-2.6 2.6,2.6, body extent -3.25,-2.54 3.25,2.54, height 1.52
TSSOP50P580X150-44N [mm] "TSSOP, 44-Leads, Body 10.55x4.00mm, Pitch 0.50mm, IPC Medium Density"
  oval 1.35x0.35 smd: 1(-2.675,5.25) 2(-2.675,4.75) 3(-2.675,4.25) 4(-2.675,3.75) 5(-2.675,3.25) 6(-2.675,2.75) 7(-2.675,2.25) 8(-2.675,1.75) 9(-2.675,1.25) 10(-2.675,0.75) 11(-2.675,0.25) 12(-2.675,-0.25) 13(-2.675,-0.75) 14(-2.675,-1.25) 15(-2.675,-1.75) 16(-2.675,-2.25) 17(-2.675,-2.75) 18(-2.675,-3.25) 19(-2.675,-3.75) 20(-2.675,-4.25) 21(-2.675,-4.75) 22(-2.675,-5.25) 23(2.675,-5.25) 24(2.675,-4.75) 25(2.675,-4.25) 26(2.675,-3.75) 27(2.675,-3.25) 28(2.675,-2.75) 29(2.675,-2.25) 30(2.675,-1.75) 31(2.675,-1.25) 32(2.675,-0.75) 33(2.675,-0.25) 34(2.675,0.25) 35(2.675,0.75) 36(2.675,1.25) 37(2.675,1.75) 38(2.675,2.25) 39(2.675,2.75) 40(2.675,3.25) 41(2.675,3.75) 42(2.675,4.25) 43(2.675,4.75) 44(2.675,5.25)
  silkscreen extent -2.8,-5.5 1.6,6.1, body extent -2.9,-5.5 2.9,5.5, height 1.5
TSSOP-24-P0.65MM-W4.4MM [mm] "Shrink Small Outline; 24 Leads"
  rect 1.45x0.3 smd: 1(-2.7,3.58) 2(-2.7,2.93) 3(-2.7,2.28) 4(-2.7,1.63) 5(-2.7,0.98) 6(-2.7,0.33) 7(-2.7,-0.32) 8(-2.7,-0.97) 9(-2.7,-1.62) 10(-2.7,-2.27) 11(-2.7,-2.92) 12(-2.7,-3.57) 13(2.75,-3.575) 14(2.75,-2.925) 15(2.75,-2.275) 16(2.75,-1.625) 17(2.75,-0.975) 18(2.75,-0.325) 19(2.75,0.325) 20(2.75,0.975) 21(2.75,1.625) 22(2.75,2.275) 23(2.75,2.925) 24(2.75,3.575)
  silkscreen extent -3.03,-4.15 2.3,4.37, body extent -3.2,-3.9 3.2,3.9, height 1.2
YSX530GA [mm]
  rect 1.7x2.4 smd: 1(-1.85,0) 2(1.85,0)
  silkscreen extent -2.8,-1.6 2.7,1.6, body extent -2.5,-1.6 2.5,1.6, height 1.2

## Part data
3V3R1 GQBDR QBENR R18 R_Q18G R_STBY1 R_STBY2 R_VBUS1 R_VBUS2 RSCL RSDA RT_0b RT_1B RT_2B RT_3B RT_4B RT_5B RT_6B RT_7B RT_8B RT_9B RT_10B RT_11B RT_12B RT_13B RT_14B RT_15B: "R - RESISTOR - SMD - 10k - 1% - 0402", JLC Availability=Basic, LCSC Part #=C25744
3V3R2 R2 R_WK RBEN RSHUNT3 RSNSN RSNSP: "R - RESISTOR - SMD - 100R - 1% - 0402", JLC Availability=Basic, LCSC Part #=C25076
C2 CSNS0 CSNS1 CSNS2 CTS_15: "C - CAPACITOR - MLCC - 100nF - 16V - 0402", JLC Availability=Basic, LCSC Part #=C1525, WVDC=16
C100 C101: "C - CAPACITOR - MLCC - 12pF - 50V - 0402", JLC Availability=Basic, LCSC Part #=C1547, WVDC=50
C102 C103 C104 C107: "C - CAPACITOR - MLCC - 10uF - 6.3V - 0402", JLC Availability=Basic, LCSC Part #=C15525, WVDC=6.3
C105 CAP1 CAP2 CAP3 CAPSRC CC0A CC0B CC1 CC2 CC3 CC4 CC5A CC5B CC6 CC7 CC8 CC9 CC10A CC10B CC11 CC12 CC13 CC14 CR1 CR2 CR3: "C - CAPACITOR - MLCC - 1uF - 25V - 0402", JLC Availability=Basic, LCSC Part #=C52923, WVDC=16
C106: "C - CAPACITOR - MLCC - 100pF - 50V - 0402", JLC Availability=Extended, LCSC Part #=C1546
CC15 R110 R_VBUS3 RC0 RC1 RC2 RC3 RC4 RC5A RC5B RC6 RC7 RC8 RC9 RC10A RC10B RC11 RC12 RC13 RC14 RLED_1 RLED_2 RLED_3 RS_0 RS_1 RS_2 RS_3 RS_4 RS_5 RS_6 RS_7 RS_8 RS_9 RS_10 RS_11 RS_12 RS_13 RS_14 RS_15 RS_16 RS_17 RS_18 RS_19 RS_20 RS_21 RS_22 RS_23 RS_24 RS_25 RS_26 RS_27 RS_28 RS_29: "R - RESISTOR - SMD - 1k - 1% - 0402", JLC Availability=Basic, LCSC Part #=C11702
D1 D2 D5V1_SB D10 D_3V3_O D_ADR_0 D_ADR_1 D_ADR_2 D_ADR_3 D_ADR_4 D_ADR_5 D_ADR_6 DC5 DC10 DC15 DSHUNT: "D - DIODE - FAST TRR - 100V - 150mA - 4ns", JLC Availability=Basic, LCSC Part #=C2128, If=150mA, PIV=100V, Trr=4ns
DBD_1 DBD_2 DS_1 DS_2 DS_3 DS_4 DS_5 DS_6 DS_VCC: "D - DIODE - ZENER - 5.1V - 500mW", JLC Availability=Extended, LCSC Part #=C8061
J1 J2 J3 J4 J5 J6 J7: "J - JACK - SMT Battery Holder 18650X2 Cells"
J100 J101: "J - JACK - USB - Type C - Recepticle - SMT - 90°", JLC Availability=LCSC, LCSC Part #=C167321
L100: "L - INDUCTOR - 10uH - 0603", JLC Availability=Basic, LCSC Part #=C1035
LED_1 LED_1A LED_2 LED_2A LED_3 LED_3A: "D - LED - 0603 - Yellow (Sodium)", JLC Availability=Extended, LCSC Part #=C409441
NT_1 NT_2 NT_C0 NT_C1 NT_C2 NT_C3 NT_C4 NT_C5 NT_C6 NT_C7 NT_C8 NT_C9 NT_C10 NT_C11 NT_C12 NT_C13 NT_C14 NT_CSHORT: library part NET_TIE, "R - Net Tie"
Q18 QBEN QSHUNT TSQ1A TSQ1b: "Q - TRANSISTOR - MOSFET (N) - 60V - 200mW", JLC Availability=Basic, LCSC Part #=C8545
Q19 Q_3V3: "Q - TRANSISTOR - MOSFET (P) - 30V - 1.4A - 0.44 Ohm", JLC Availability=Basic, LCSC Part #=C15127
QBD_1A QBD_1B QBD_2A QBD_2B QBD_3A QBD_3B QBD_4A QBD_4B QBD_5A QBD_5B: "Q - TRANSISTOR - MOSFET (P) - 60V - 12A - 0.1R", JLC Availability=Extended, LCSC Part #=C326372
R100 R101: "R - RESISTOR - SMD - 22R - 1% - 0402", JLC Availability=Basic, LCSC Part #=C25092
R102 R103 R104 RDS_5 RDS_6: "R - RESISTOR - SMD - 0R - 1% - 0402", JLC Availability=Basic, LCSC Part #=C17168
R106: "R - RESISTOR - SMD - 1.5k - 1% - 0402", JLC Availability=Basic, LCSC Part #=C25867
R108 R109: "R - RESISTOR - SMD - 5.1k - 1% - 0402", JLC Availability=Basic, LCSC Part #=C25905
RSHUNT RSHUNT2: "R - RESISTOR - SMD - 100k - 1% -  0402", JLC Availability=Basic, LCSC Part #=C25741
RSNS: library part MRF6432(2512)LR001FTS, "R - RESISTOR - SMD - 0.001R - 1% - 2512 - 2W", JLC Availability=Extended, LCSC Part #=C76233, Power=2W, ComponentLink1Description=http://riedon.com/media/pdf/CSR.pdf, ComponentLink1URL=http://riedon.com/media/pdf/CSR.pdf
RTS2 TS_C1_A TS_C1_B TS_C2_A TS_C2_B TS_C3_A TS_C3_B TS_C4_A TS_C4_B TS_C5_A TS_C5_B TS_C6_A TS_C6_B TS_C7_A TS_C7_B TS_C8_A TS_C8_B TS_C9_A TS_C9_B TS_C10_A TS_C10_B TS_C11_A TS_C11_B TS_C12_A TS_C12_B TS_C13_B TS_C13A TS_C14_A TS_C14_B: "RT - NTC THERMISTOR - 10k - 1% - 0402", JLC Availability=Extended, LCSC Part #=C77131, Value2=3380k
SW1 SW_WAKE: "SW - SWITCH - SPST - NO - Top Actuated Surface Mount", JLC Availability=Extended, LCSC Part #=C318889
U1: "9 to 15-series cell li-ion and li-phosphate battery monitor (bq76940 family)"
U2: "U - IC -16 Port Analog MUX", JLC Availability=Extended, LCSC Part #=C179326, ComponentLink1Description="Manufacturer URL", ComponentLink1URL=http://www.st.com/web/en/home.html, ComponentLink2Description=Datasheet, ComponentLink2URL=http://www.st.com/st-web-ui/static/active/en/resource/technical/document/datasheet/CD00161566.pdf, ComponentLink3Description="Package Specification", ComponentLink3URL=http://www.st.com/st-web-ui/static/active/en/resource/technical/document/datasheet/DM00058181.pdf
U100: "U - IC - MCU, 128 KB Flash, 20 KB Internal RAM, 37 I/Os, 48-pin LQFP, -40 to 85 degC", I/Os (High Current)=37, JLC Availability=Extended, LCSC Part #=C77979, Operating Frequency(F) (Processor speed) (MHz)=72, ComponentLink1Description="Manufacturer URL", ComponentLink1URL=http://www.st.com/web/en/home.html, ComponentLink2Description=Datasheet, ComponentLink2URL=http://www.st.com/st-web-ui/static/active/en/resource/technical/document/datasheet/CD00161566.pdf, ComponentLink3Description="Package Specification", ComponentLink3URL=http://www.st.com/st-web-ui/static/active/en/resource/technical/document/datasheet/DM00058181.pdf, FLASH Size (Prog) (kB)=128, Internal RAM Size (kB)=20
U101: "U - IC - LDO 3.3V 200mA", JLC Availability=Basic, LCSC Part #=C5446, VOut=3.3
Y100: "Y - RESONATOR - 8MHZ ±10PPM - SMD-5032", LCSC Part #=C115962, Availability=Basic

## Free pads (board coordinates)
  rect 0.7x2.6 smd far side: A1(236.5,394) A82(319.5,394)
  rect 0.7x4.6 smd far side: A2(237.5,393) A81(318.5,393)
  rect 0.7x3.8 smd far side: A3(238.5,393.45) A4(239.5,393.45) A5(240.5,393.45) A6(241.5,393.45) A7(242.5,393.45) A8(243.5,393.45) A9(244.5,393.45) A10(245.5,393.45) A11(246.5,393.45) A12(249.5,393.45) A13(250.5,393.45) A14(251.5,393.45) A15(252.5,393.45) A16(253.5,393.45) A17(254.5,393.45) A18(255.5,393.45) A19(256.5,393.45) A20(257.5,393.45) A21(258.5,393.45) A22(259.5,393.45) A23(260.5,393.45) A24(261.5,393.45) A27(264.5,393.45) A28(265.5,393.45) A29(266.5,393.45) A30(267.5,393.45) A31(268.5,393.45) A32(269.5,393.45) A33(270.5,393.45) A34(271.5,393.45) A35(272.5,393.45) A36(273.5,393.45) A37(274.5,393.45) A38(275.5,393.45) A41(278.5,393.45) A42(279.5,393.45) A43(280.5,393.45) A44(281.5,393.45) A45(282.5,393.45) A46(283.5,393.45) A47(284.5,393.45) A48(285.5,393.45) A49(286.5,393.45) A50(287.5,393.45) A51(288.5,393.45) A52(289.5,393.45) A55(292.5,393.45) A56(293.5,393.45) A57(294.5,393.45) A58(295.5,393.45) A59(296.5,393.45) A60(297.5,393.45) A61(298.5,393.45) A62(299.5,393.45) A63(300.5,393.45) A66(303.5,393.45) A67(304.5,393.45) A68(305.5,393.45) A71(308.5,393.45) A72(309.5,393.45) A73(310.5,393.45) A76(313.5,393.45) A77(314.5,393.45) A78(315.5,393.45)
  rect 0.7x2.6 smd: B1(236.5,394) B82(319.5,394)
  rect 0.7x4.6 smd: B2(237.5,393) B81(318.5,393)
  rect 0.7x3.8 smd: B3(238.5,393.45) B4(239.5,393.45) B5(240.5,393.45) B6(241.5,393.45) B7(242.5,393.45) B8(243.5,393.45) B9(244.5,393.45) B10(245.5,393.45) B11(246.5,393.45) B12(249.5,393.45) B13(250.5,393.45) B14(251.5,393.45) B15(252.5,393.45) B16(253.5,393.45) B17(254.5,393.45) B18(255.5,393.45) B19(256.5,393.45) B20(257.5,393.45) B21(258.5,393.45) B22(259.5,393.45) B23(260.5,393.45) B24(261.5,393.45) B27(264.5,393.45) B28(265.5,393.45) B29(266.5,393.45) B30(267.5,393.45) B31(268.5,393.45) B32(269.5,393.45) B33(270.5,393.45) B34(271.5,393.45) B35(272.5,393.45) B36(273.5,393.45) B37(274.5,393.45) B38(275.5,393.45) B41(278.5,393.45) B42(279.5,393.45) B43(280.5,393.45) B44(281.5,393.45) B45(282.5,393.45) B46(283.5,393.45) B47(284.5,393.45) B48(285.5,393.45) B49(286.5,393.45) B50(287.5,393.45) B51(288.5,393.45) B52(289.5,393.45) B55(292.5,393.45) B56(293.5,393.45) B57(294.5,393.45) B58(295.5,393.45) B59(296.5,393.45) B60(297.5,393.45) B61(298.5,393.45) B62(299.5,393.45) B63(300.5,393.45) B66(303.5,393.45) B67(304.5,393.45) B68(305.5,393.45) B71(308.5,393.45) B72(309.5,393.45) B73(310.5,393.45) B76(313.5,393.45) B77(314.5,393.45) B78(315.5,393.45)
  rect 6x6 hole 4.2: M(164.4,520.4) M(499,391.5)
  rect 6x7 hole 4.2: M(164.4,605.8)

## Via types
v1: diameter 0.48, hole 0.254, Top Layer to Bottom Layer, tented both sides, 384 vias
v2: diameter 0.508, hole 0.254, Top Layer to Bottom Layer, tented both sides, 54 vias
v3: diameter 1.27, hole 0.6, Top Layer to Bottom Layer, tented both sides, 20 vias

## Nets (pads, with @x,y where several pads share a name; then routed paths per layer and width w, separated by ;. In a path a pad name is that pad's centre, name@x,y a point inside that pad or via, vN(x,y) a via of type N, cw(c..) or ccw(c..) an arc to the next point about the centre after c; other vN are vias at no path point)
3V3_EN: 3V3R2.2 U100.3 | length 16.7
  Top Layer w0.2: U100.3@246.337,587.5 247.212,587.5 247.519,587.5 248.919,586.1 248.919,585 249.619,584.3 v2(249.719,584.3)
  Bottom Layer w0.2: v2@249.819,584.2 249.919,584.3 253.119,584.3 255.519,586.7 260.119,586.7
^PB2_BOOT1: R110.1 SW1.1 U100.20 | length 26.9
  Top Layer w0.2: R110.1@239.62,597.2 240.319,597.2 ; 240.312,597.2 240.319,597.2 ; U100.20@241.412,593.425 241.412,595.307 240.919,595.8 v2(240.919,596.2) 240.919,596.6 240.319,597.2 ; v2@253.519,595.7 253.619,595.6 SW1.1@253.619,586.9
  Bottom Layer w0.2: v2(240.919,596.2) 240.919,595.7 253.506,595.7 253.512,595.707 v2(253.512,595.7)
A_GND: C105.1 CTS_15.1 NT_1.1 R102.2 RTS2.1 TSQ1A.2 TSQ1b.2 U100.8 | length 47.8
  Top Layer w0.2: 203.4,451.7 205,451.7 205.9,450.8 205.9,446.8 206.5,446.2 209.8,446.2 209.8,447.3 ; TSQ1b.2@208.8,450.85 208.85,450.9 209.8,450.9 209.8,447.3 ; TSQ1A.2@208.85,447.25 208.85,447.3 209.8,447.3 ; TSQ1A.2@208.85,447.35 TSQ1A.2@209.05,447.35 ; v2(245.112,590) U100.8@246.337,590 ; R102.2@247.97,595.608 C105.1@249.112,595.608 ; C105.1@249.112,595.6 250.512,595.6 251.012,595.1 251.012,593.9 251.212,593.7 252.412,593.7 252.819,593.293 v2(252.819,590) ; RTS2.1@392.281,401.7 392.281,402.5
  Top Layer w0.5: v1(258.819,585.2) v1(258.819,589.2)
  Bottom Layer w0.2: v2(245.112,590) v2(252.819,590) 253.619,589.2 v1(258.819,589.2)
ADDRESS_SENSE_EN: U100.38 | length 6.9
  Top Layer w0.2: 239.912,583.95 239.912,583.5 ; U100.38@239.912,585.075 239.919,583.5 239.912,583.5 ; 243.219,580 239.919,583.3 239.919,583.494 239.912,583.5
AFE_ALERT: U1.44 U100.2 | length 10.5
  Top Layer w0.2: v1@201.6,483.519 v1(201.7,483.419) 202.057,483.062 U1.44@202.875,483.062 ; U100.2@246.337,587 247.419,587 248.519,585.9 248.519,584.5 249.819,583.2 251.219,583.2 252.219,584.2
  Bottom Layer w0.2: 201.4,483.219 v1@201.6,483.419 ; v1@201.593,483.419 v1@201.6,483.419 ; v1(201.7,483.419) v1@201.6,483.419
AFE_SCL: RSCL.2 U1.5 U100.21 | length 30.1
  Top Layer w0.2: U1.5@197.525,481.062 199.143,481.062 199.25,481.169 199.25,481.362 199.3,481.412 RSCL.2@199.3,484.012 ; v2(240.219,596.2) 240.219,595.7 240.912,595.007 U100.21@240.912,593.425
  Bottom Layer w0.2: 199.007,481.019 v1@199.3,481.312 ; v2@240.219,596.391 240.219,596.4 241.325,597.506 241.522,597.506 241.528,597.5 256.612,597.5 259.419,594.693 259.419,594.7 v1(260.619,594.7)
  other v1: 199.3,481.212
AFE_SDA: RSDA.2 U1.4 U100.22 | length 29.4
  Top Layer w0.2: U1.4@197.525,481.562 198.6,481.562 v1@198.6,481.712 ; RSDA.2@198.4,484.112 198.4,483.719 198.7,483.419 v1(198.7,481.712) ; RSDA.2@198.5,484.204 RSDA.2@198.5,484.312 ; v2@239.519,596.107 239.419,596.007 239.419,595.7 240.412,594.707 U100.22@240.412,593.8
  Bottom Layer w0.2: 198.507,481.519 v1(198.7,481.712) ; v2@239.519,596.2 239.519,596.4 241.019,597.9 256.812,597.9 259.512,595.2 v1(260.119,595.2)
  other v2: 239.419,596.2
AFE_WAKE: U1.6 U100.26 | length 28.3
  Top Layer w0.2: U1.6@197.525,480.562 v1@199.35,480.562 ; U100.26@237.987,591.5 241.012,591.5 241.222,591.71 242.122,591.71 v2(242.212,591.8) v2@242.212,591.9
  Bottom Layer w0.2: v1@199.393,480.519 v1@199.4,480.512 ; v2@242.312,591.9 242.312,592.993 244.419,595.1 256.612,595.1 258.412,593.3 258.512,593.2 260.819,593.2 v1(261.319,593.7)
  other v1: 199.3,480.412
B_SCL: U100.42 | length 22.1
  Top Layer w0.2: U100.42@241.912,585.075 241.912,583.5 242.412,583 ; 242.162,583.25 v2(243.112,582.3) v2@243.212,582.2
  Bottom Layer w0.2: v2@243.212,582.2 243.512,581.9 250.712,581.9 252.312,583.5 253.719,583.5 255.919,585.7 259.119,585.7 v1(259.619,585.2)
B_SDA: U100.43 | length 21.4
  Top Layer w0.2: U100.43@242.412,585.075 242.412,583.8 v2@243.712,582.5 ; v1(259.619,586.2) 259.619,586.1 259.669,586.15 260.119,585.7
  Bottom Layer w0.2: v2(243.812,582.5) 243.912,582.5 244.112,582.3 250.419,582.3 252.019,583.9 253.419,583.9 255.719,586.2 v1(259.619,586.2)
BATT_EN: QBEN.1 QBENR.1 U100.14 | length 23.9
  Top Layer w0.2: v1(194,484.519) QBENR.1@194.7,484.519 ; QBENR.1@194.792,484.519 QBENR.1@194.8,484.519 ; U100.14@244.412,593.7 244.412,595.1 246.012,596.7 246.619,596.7 254.851,596.7 260.93,590.527 262.719,590.5 262.912,590.5
C0: CC0A.1 NT_C0.1 RC0.2 | length 62.6
  Top Layer w0.2: v1@205.881,490.1 v1(205.9,490.1) 209.9,490.1 CC0A.1@209.9,489.319 ; v1(205.9,488.8) 207.8,488.8 ; 207.8,488.7 207.8,488.8 ; RC0.2@207.808,488.112 207.8,488.112 207.8,488.8 ; CC0A.1@209.908,489.219 v1(210.7,489.219)
  Top Layer w0.4: v1(210.7,489.219) 214.9,489.219 v1(214.9,456.4)
  Bottom Layer w0.4: v1(205.9,488.8) v1(205.9,490.1) ; v1(214.9,456.4) 222.6,448.7 v1@222.6,443.6
  other v1: 222.6,443.619
C1: CC0B.2 CC1.1 NT_C1.2 RC1.2 | length 53.2
  Top Layer w0.2: RC1.2@207.7,487.012 RC1.2@207.808,487.012 CC1.1@208.892,487.012 ; CC1.1@208.9,487.012 CC1.1@208.892,487.012 ; CC0B.2@209.8,488.012 209.8,487.92 CC1.1@208.892,487.012 ; CC0B.2@209.8,488.112 209.808,488.12 CC0B.2@209.892,488.12 ; CC0B.2@210,488.312 209.9,488.212 209.85,488.162 CC0B.2@209.892,488.12 ; v1(210.7,488.119) 209.893,488.119 CC0B.2@209.892,488.12
  Bottom Layer w0.4: v1(210.7,488.119) 210.1,488.719 210.1,515.3 v1(232.1,515.3)
C2: CC1.2 CC2.1 NT_C2.1 RC2.2 | length 84.9
  Top Layer w0.2: RC2.2@207.8,485.912 RC2.2@207.808,485.912 RC2.2@207.9,485.912 ; RC2.2@207.8,486.012 RC2.2@207.9,485.912 ; CC2.1@208.9,485.912 CC2.1@208.892,485.912 ; CC1.2@209.9,487.012 CC1.2@209.992,487.104 ; CC1.2@209.908,487.012 209.992,487.012 CC2.1@208.892,485.912 ; CC1.2@210,487.019 v1(210.7,487.019) ; RC2.2@207.9,485.912 CC2.1@208.892,485.912
  Top Layer w0.4: v1@210.7,487 214.3,487 214.3,456.019 v1(214.3,456)
  Bottom Layer w0.4: v1(214.3,456) 221.9,448.4 221.9,443 v1(252.3,443)
C3: CC2.2 CC3.1 NT_C3.2 RC3.2 | length 97.1
  Top Layer w0.2: RC3.2@207.7,484.712 RC3.2@207.8,484.812 ; RC3.2@207.7,484.812 RC3.2@207.8,484.812 ; CC3.1@208.8,484.812 RC3.2@207.808,484.812 RC3.2@207.8,484.812 ; CC3.1@208.892,484.812 209.9,485.82 CC2.2@209.908,485.82 ; CC2.2@209.792,485.904 CC2.2@209.9,486.012 ; CC2.2@209.9,485.912 CC2.2@209.908,485.912 v1@210.693,485.912
  Bottom Layer w0.4: v1(210.7,485.919) 209.5,487.119 209.5,515.9 v1(272.5,515.9)
C4: CC3.2 CC4.1 NT_C4.1 RC4.2 | length 123.7
  Top Layer w0.2: RC4.2@207.8,483.712 RC4.2@207.808,483.712 CC4.1@208.892,483.712 CC4.1@208.9,483.712 ; CC4.1@208.7,483.612 208.8,483.612 CC4.1@208.9,483.712 ; CC4.1@209,483.712 CC4.1@208.9,483.712 ; CC3.2@210.015,484.919 CC3.2@209.908,484.812 ; v1@210.6,484.812 CC3.2@209.908,484.812 ; CC4.1@208.9,483.712 209.908,484.72 CC3.2@209.908,484.812
  Top Layer w0.4: v1@210.8,484.8 213.7,484.8 v1(213.7,455.6)
  Bottom Layer w0.4: v1(213.7,455.6) 221.3,448 221.3,442.4 v1(292.8,442.4)
  other v1: 210.7,484.819
C5: CC4.2 CC5A.1 NT_C5.2 RC5A.2 RC5B.2 | length 143.5
  Top Layer w0.2: RC5B.2@209.8,481.312 RC5B.2@209.9,481.312 ; CC5A.1@209.908,480.112 CC5A.1@209.908,480.212 CC5A.1@209.908,480.311 ; RC5B.2@209.91,481.35 RC5B.2@209.908,481.35 ; CC5A.1@210,480.219 CC5A.1@209.908,480.311 ; v1(210.7,483.719) 209.908,483.719 CC4.2@209.908,483.712 CC4.2@209.908,483.504 ; RC5B.2@209.9,481.312 209.9,481.519 RC5B.2@209.908,481.519 ; RC5B.2@209.9,481.312 209.9,480.319 CC5A.1@209.908,480.311 ; RC5B.2@209.9,481.312 RC5B.2@209.908,481.312 ; CC5A.1@209.908,480.311 RC5B.2@209.908,481.312 ; RC5B.2@209.908,481.312 RC5B.2@209.908,481.35 ; RC5B.2@209.908,481.35 RC5B.2@209.908,481.519 ; RC5B.2@209.908,481.519 RC5A.2@209.908,482.512 CC4.2@209.908,483.504 ; CC4.2@209.908,483.504 209.9,483.512 CC4.2@209.908,483.504
  Bottom Layer w0.4: v1(210.7,483.719) 208.9,485.519 208.9,516.5 v1(313,516.5)